# EAGLE board keyswitch (EAGLE 8.1.1)
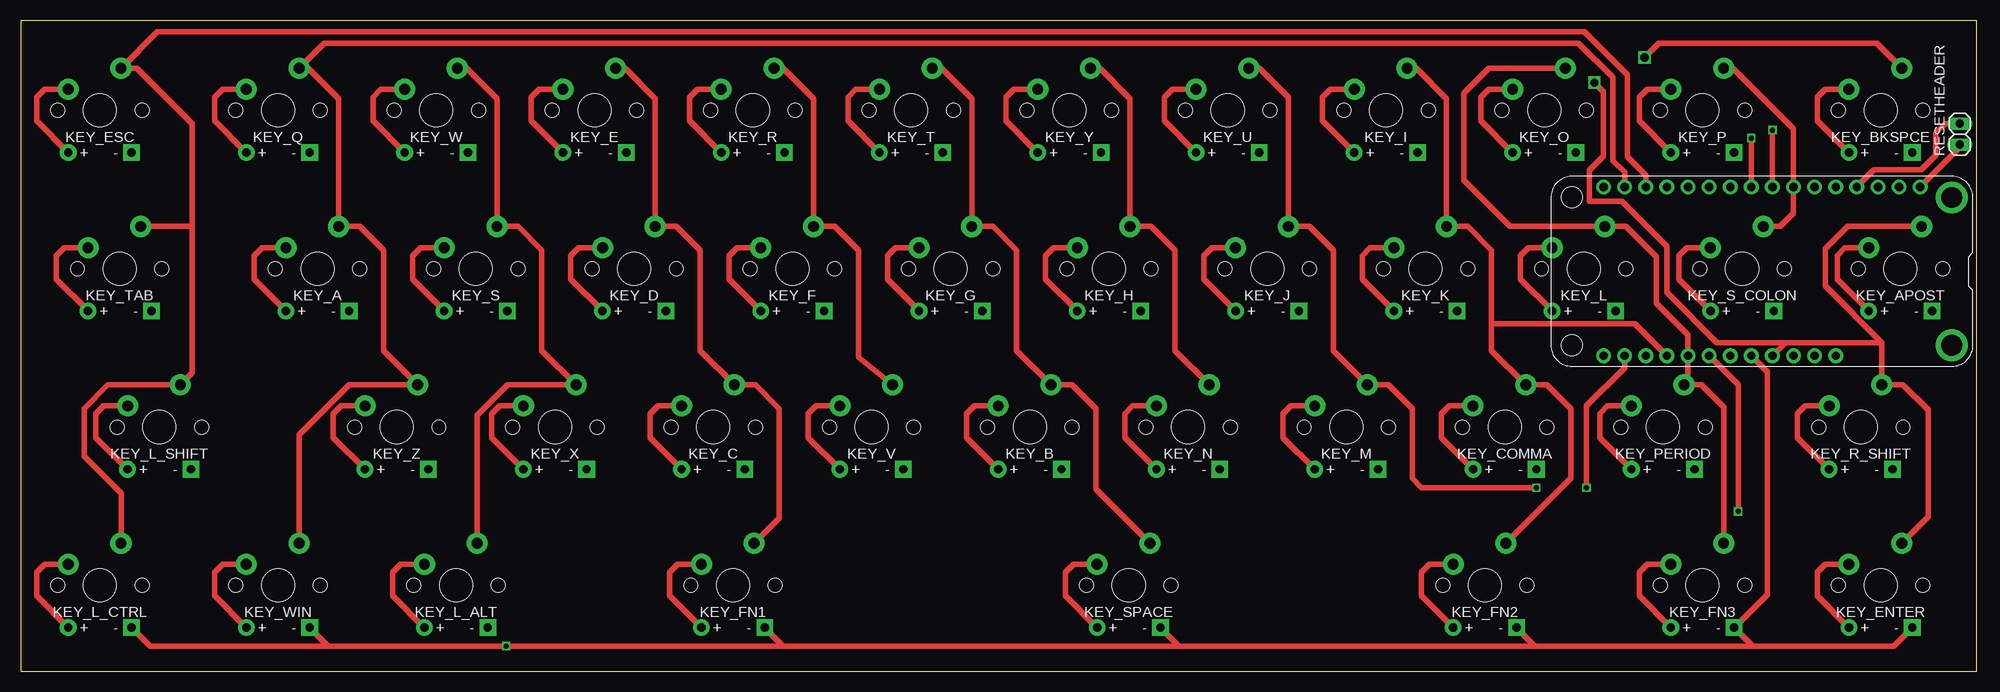
[diagram p0: board, top side]
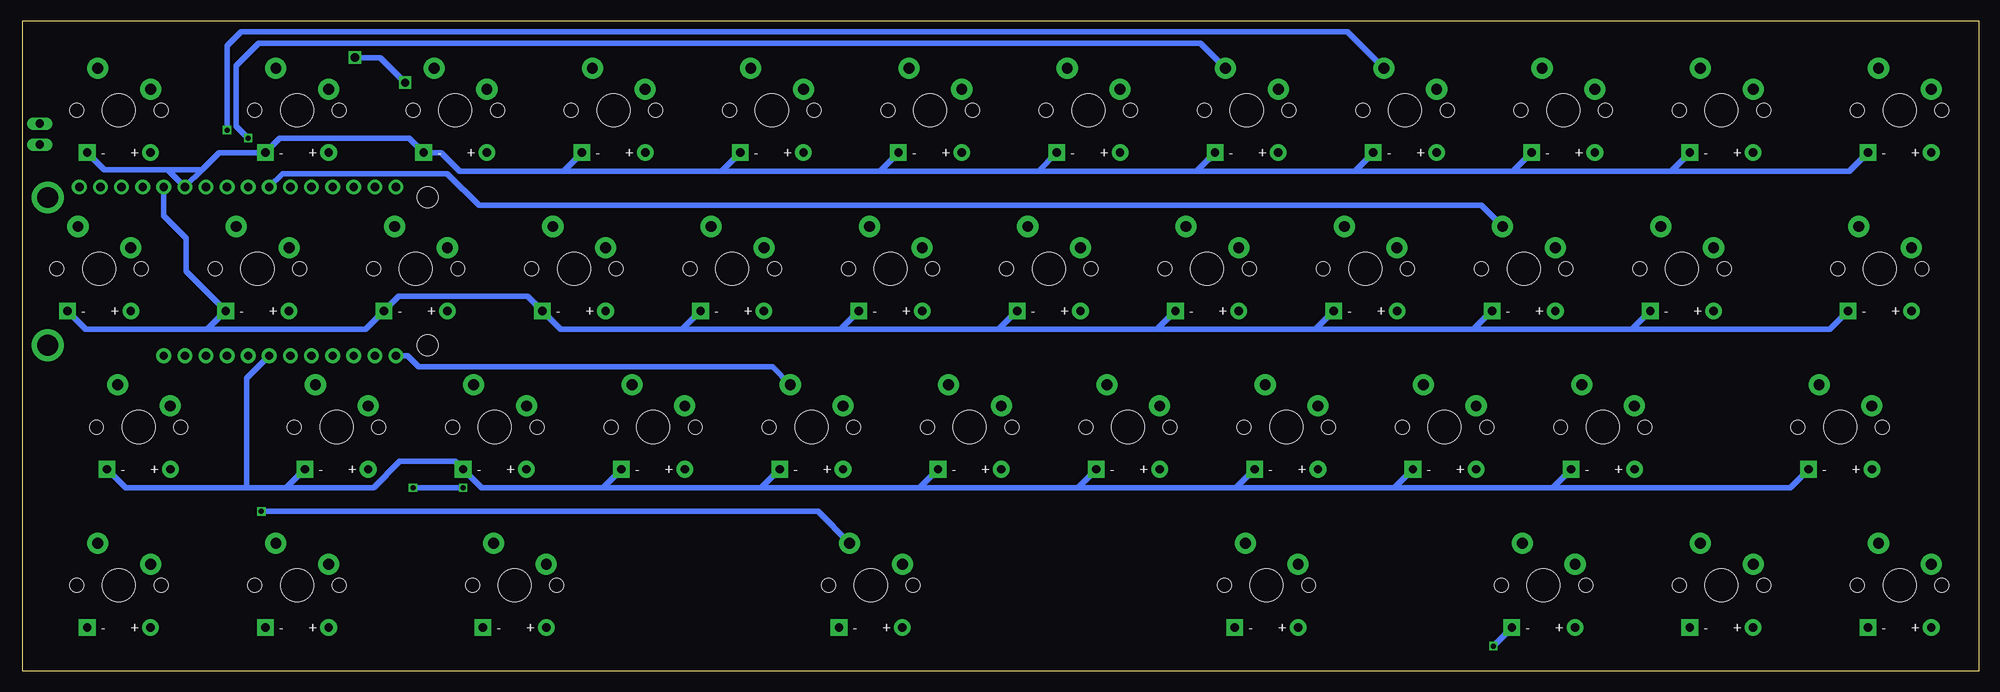
[diagram p1: board, bottom side, seen from below]

Size 235.41 x 78.25 mm. Coordinates in mm from the lower left corner, seen from the top.
Outline: 0,0 235.41,0 235.41,78.25 0,78.25 0,0
Copper layers (1*16): Top 0.035mm / dielectric 1.5mm / Bottom 0.035mm
Design rules "keyswitch": minimum track width 10mil, minimum drill 20mil, track to track 0.205mm, track to pad 0.205mm, pad to pad 0.205mm, via to via 0.205mm, smd to smd 8mil, copper to edge 20mil, drill to drill 8mil, minimum pad ring 10mil, minimum via ring 8mil, stop-mask expansion 4mil, vias tented up to drill 0mil, thermal gap 10mil
Net classes: 0 default: clearance 0.205 mm

## Footprints (pad centres in the part's own frame; a part is rotated, then mirrored left to right if it is on the bottom)
FEATHERWING_DIM = drill 1 pad 1.778: 1 6.35,1.27; 2 8.89,1.27; 3 11.43,1.27; 4 13.97,1.27; 5 16.51,1.27; 6 19.05,1.27; 7 21.59,1.27; 8 24.13,1.27; 9 26.67,1.27; 10 29.21,1.27; 11 31.75,1.27; 12 34.29,1.27; 13 36.83,1.27; 14 39.37,1.27; 15 41.91,1.27; 16 44.45,1.27; 17 44.45,21.59; 18 41.91,21.59; 19 39.37,21.59; 20 36.83,21.59; 21 34.29,21.59; 22 31.75,21.59; 23 29.21,21.59; 24 26.67,21.59; 25 24.13,21.59; 26 21.59,21.59; 27 19.05,21.59; 28 16.51,21.59 | drill 2.5 pad 3.81: P$1 2.54,20.32; P$2 2.54,2.54 | hole 2.54: 48.26,20.32; 48.26,2.54
MX-1U-DIODE = drill 1 pad 2: D+ -3.81,-5.08 | drill 1 pad 2 square: D- 3.81,-5.08 | drill 1.3 pad 2.54: MX1 -3.81,2.54; MX2 2.54,5.08 | hole 4: 0,0 | hole 1.7: -5.08,0; 5.08,0
1X02 = drill 1.016 long: 1 -1.27,0; 2 1.27,0

## Placement (x,y rotation side)
FEATHER  FEATHERWING_NODIM  [FEATHERWING_DIM]  234.95,59.53 180 top
KEY_A  KEYSWITCH-DIODE-MX-1U-DIODE  [MX-1U-DIODE]  35.72,48.42 0 top
KEY_APOST  KEYSWITCH-DIODE-MX-1U-DIODE  [MX-1U-DIODE]  226.22,48.42 0 top
KEY_B  KEYSWITCH-DIODE-MX-1U-DIODE  [MX-1U-DIODE]  121.44,29.37 0 top
KEY_BKSPCE  KEYSWITCH-DIODE-MX-1U-DIODE  [MX-1U-DIODE]  223.84,67.47 0 top
KEY_C  KEYSWITCH-DIODE-MX-1U-DIODE  [MX-1U-DIODE]  83.34,29.37 0 top
KEY_COMMA  KEYSWITCH-DIODE-MX-1U-DIODE  [MX-1U-DIODE]  178.59,29.37 0 top
KEY_D  KEYSWITCH-DIODE-MX-1U-DIODE  [MX-1U-DIODE]  73.82,48.42 0 top
KEY_E  KEYSWITCH-DIODE-MX-1U-DIODE  [MX-1U-DIODE]  69.06,67.47 0 top
KEY_ENTER  KEYSWITCH-DIODE-MX-1U-DIODE  [MX-1U-DIODE]  223.84,10.32 0 top
KEY_ESC  KEYSWITCH-DIODE-MX-1U-DIODE  [MX-1U-DIODE]  9.53,67.47 0 top
KEY_F  KEYSWITCH-DIODE-MX-1U-DIODE  [MX-1U-DIODE]  92.87,48.42 0 top
KEY_FN1  KEYSWITCH-DIODE-MX-1U-DIODE  [MX-1U-DIODE]  85.73,10.32 0 top
KEY_FN2  KEYSWITCH-DIODE-MX-1U-DIODE  [MX-1U-DIODE]  176.21,10.32 0 top
KEY_FN3  KEYSWITCH-DIODE-MX-1U-DIODE  [MX-1U-DIODE]  202.41,10.32 0 top
KEY_G  KEYSWITCH-DIODE-MX-1U-DIODE  [MX-1U-DIODE]  111.92,48.42 0 top
KEY_H  KEYSWITCH-DIODE-MX-1U-DIODE  [MX-1U-DIODE]  130.97,48.42 0 top
KEY_I  KEYSWITCH-DIODE-MX-1U-DIODE  [MX-1U-DIODE]  164.31,67.47 0 top
KEY_J  KEYSWITCH-DIODE-MX-1U-DIODE  [MX-1U-DIODE]  150.02,48.42 0 top
KEY_K  KEYSWITCH-DIODE-MX-1U-DIODE  [MX-1U-DIODE]  169.07,48.42 0 top
KEY_L  KEYSWITCH-DIODE-MX-1U-DIODE  [MX-1U-DIODE]  188.12,48.42 0 top
KEY_L_ALT  KEYSWITCH-DIODE-MX-1U-DIODE  [MX-1U-DIODE]  52.39,10.32 0 top
KEY_L_CTRL  KEYSWITCH-DIODE-MX-1U-DIODE  [MX-1U-DIODE]  9.53,10.32 0 top
KEY_L_SHIFT  KEYSWITCH-DIODE-MX-1U-DIODE  [MX-1U-DIODE]  16.67,29.37 0 top
KEY_M  KEYSWITCH-DIODE-MX-1U-DIODE  [MX-1U-DIODE]  159.54,29.37 0 top
KEY_N  KEYSWITCH-DIODE-MX-1U-DIODE  [MX-1U-DIODE]  140.49,29.37 0 top
KEY_O  KEYSWITCH-DIODE-MX-1U-DIODE  [MX-1U-DIODE]  183.36,67.47 0 top
KEY_P  KEYSWITCH-DIODE-MX-1U-DIODE  [MX-1U-DIODE]  202.41,67.47 0 top
KEY_PERIOD  KEYSWITCH-DIODE-MX-1U-DIODE  [MX-1U-DIODE]  197.64,29.37 0 top
KEY_Q  KEYSWITCH-DIODE-MX-1U-DIODE  [MX-1U-DIODE]  30.96,67.47 0 top
KEY_R  KEYSWITCH-DIODE-MX-1U-DIODE  [MX-1U-DIODE]  88.11,67.47 0 top
KEY_R_SHIFT  KEYSWITCH-DIODE-MX-1U-DIODE  [MX-1U-DIODE]  221.46,29.37 0 top
KEY_S  KEYSWITCH-DIODE-MX-1U-DIODE  [MX-1U-DIODE]  54.77,48.42 0 top
KEY_S_COLON  KEYSWITCH-DIODE-MX-1U-DIODE  [MX-1U-DIODE]  207.17,48.42 0 top
KEY_SPACE  KEYSWITCH-DIODE-MX-1U-DIODE  [MX-1U-DIODE]  133.35,10.32 0 top
KEY_T  KEYSWITCH-DIODE-MX-1U-DIODE  [MX-1U-DIODE]  107.16,67.47 0 top
KEY_TAB  KEYSWITCH-DIODE-MX-1U-DIODE  [MX-1U-DIODE]  11.91,48.42 0 top
KEY_U  KEYSWITCH-DIODE-MX-1U-DIODE  [MX-1U-DIODE]  145.26,67.47 0 top
KEY_V  KEYSWITCH-DIODE-MX-1U-DIODE  [MX-1U-DIODE]  102.39,29.37 0 top
KEY_W  KEYSWITCH-DIODE-MX-1U-DIODE  [MX-1U-DIODE]  50.01,67.47 0 top
KEY_WIN  KEYSWITCH-DIODE-MX-1U-DIODE  [MX-1U-DIODE]  30.96,10.32 0 top
KEY_X  KEYSWITCH-DIODE-MX-1U-DIODE  [MX-1U-DIODE]  64.29,29.37 0 top
KEY_Y  KEYSWITCH-DIODE-MX-1U-DIODE  [MX-1U-DIODE]  126.21,67.47 0 top
KEY_Z  KEYSWITCH-DIODE-MX-1U-DIODE  [MX-1U-DIODE]  45.24,29.37 0 top
RESETHEADER  [1X02]  233.36,64.61 90 top

## Library data of the parts
FEATHER = adafruit
KEY_A KEY_APOST KEY_B KEY_BKSPCE KEY_C KEY_COMMA KEY_D KEY_E KEY_ENTER KEY_ESC KEY_F KEY_FN1-KEY_FN3 KEY_G KEY_H KEY_I KEY_J KEY_K KEY_L KEY_L_ALT KEY_L_CTRL KEY_L_SHIFT KEY_M KEY_N KEY_O KEY_P KEY_PERIOD KEY_Q KEY_R KEY_R_SHIFT KEY_S KEY_S_COLON KEY_SPACE KEY_T KEY_TAB KEY_U KEY_V KEY_W KEY_WIN KEY_X KEY_Y KEY_Z = Keyboard
RESETHEADER = pinhead

## Nets
GND: FEATHER.4 RESETHEADER.2
N$1: KEY_ESC.D+ KEY_ESC.MX1
N$2: KEY_Q.D+ KEY_Q.MX1
N$3: KEY_W.D+ KEY_W.MX1
N$4: KEY_E.D+ KEY_E.MX1
N$5: KEY_R.D+ KEY_R.MX1
N$6: KEY_T.D+ KEY_T.MX1
N$7: KEY_Y.D+ KEY_Y.MX1
N$8: KEY_U.D+ KEY_U.MX1
N$9: KEY_I.D+ KEY_I.MX1
N$10: KEY_O.D+ KEY_O.MX1
N$11: KEY_P.D+ KEY_P.MX1
N$12: KEY_BKSPCE.D+ KEY_BKSPCE.MX1
N$13: KEY_TAB.D+ KEY_TAB.MX1
N$14: KEY_A.D+ KEY_A.MX1
N$15: KEY_S.D+ KEY_S.MX1
N$16: KEY_D.D+ KEY_D.MX1
N$17: KEY_F.D+ KEY_F.MX1
N$18: KEY_G.D+ KEY_G.MX1
N$19: KEY_H.D+ KEY_H.MX1
N$20: KEY_J.D+ KEY_J.MX1
N$21: KEY_K.D+ KEY_K.MX1
N$22: KEY_L.D+ KEY_L.MX1
N$23: KEY_S_COLON.D+ KEY_S_COLON.MX1
N$24: KEY_APOST.D+ KEY_APOST.MX1
N$25: KEY_L_SHIFT.D+ KEY_L_SHIFT.MX1
N$26: KEY_Z.D+ KEY_Z.MX1
N$27: KEY_X.D+ KEY_X.MX1
N$28: KEY_C.D+ KEY_C.MX1
N$29: KEY_V.D+ KEY_V.MX1
N$30: KEY_B.D+ KEY_B.MX1
N$31: KEY_N.D+ KEY_N.MX1
N$32: KEY_M.D+ KEY_M.MX1
N$33: KEY_COMMA.D+ KEY_COMMA.MX1
N$34: KEY_PERIOD.D+ KEY_PERIOD.MX1
N$35: FEATHER.8 KEY_C.MX2 KEY_D.MX2 KEY_E.MX2 KEY_FN1.MX2
N$36: KEY_R_SHIFT.D+ KEY_R_SHIFT.MX1
N$37: KEY_WIN.D+ KEY_WIN.MX1
N$38: KEY_L_ALT.D+ KEY_L_ALT.MX1
N$39: KEY_FN1.D+ KEY_FN1.MX1
N$40: FEATHER.1 RESETHEADER.1
N$41: KEY_SPACE.D+ KEY_SPACE.MX1
N$42: FEATHER.15 KEY_A.MX2 KEY_Q.MX2 KEY_WIN.MX2 KEY_Z.MX2
N$43: FEATHER.10 KEY_L_ALT.MX2 KEY_S.MX2 KEY_W.MX2 KEY_X.MX2
N$44: KEY_FN2.D+ KEY_FN2.MX1
N$45: KEY_FN3.D+ KEY_FN3.MX1
N$46: FEATHER.22 KEY_B.MX2 KEY_G.MX2 KEY_SPACE.MX2 KEY_T.MX2
N$47: KEY_ENTER.D+ KEY_ENTER.MX1
N$49: FEATHER.9 KEY_F.MX2 KEY_R.MX2 KEY_V.MX2
N$50: FEATHER.24 KEY_ENTER.D- KEY_FN1.D- KEY_FN2.D- KEY_FN3.D- KEY_L_ALT.D- KEY_L_CTRL.D- KEY_SPACE.D- KEY_WIN.D-
N$51: FEATHER.17 KEY_H.MX2 KEY_N.MX2 KEY_Y.MX2
N$52: FEATHER.21 KEY_FN3.MX2 KEY_L.MX2 KEY_O.MX2 KEY_PERIOD.MX2
N$53: FEATHER.20 KEY_COMMA.MX2 KEY_FN2.MX2 KEY_I.MX2 KEY_K.MX2
N$54: FEATHER.18 KEY_J.MX2 KEY_M.MX2 KEY_U.MX2
N$55: FEATHER.7 KEY_P.MX2 KEY_S_COLON.MX2
N$56: FEATHER.25 KEY_APOST.MX2 KEY_BKSPCE.MX2 KEY_ENTER.MX2 KEY_R_SHIFT.MX2
N$57: FEATHER.6 KEY_BKSPCE.D- KEY_E.D- KEY_ESC.D- KEY_I.D- KEY_O.D- KEY_P.D- KEY_Q.D- KEY_R.D- KEY_T.D- KEY_U.D- KEY_W.D- KEY_Y.D-
N$58: FEATHER.14 KEY_ESC.MX2 KEY_L_CTRL.MX2 KEY_L_SHIFT.MX2 KEY_TAB.MX2
N$59: FEATHER.23 KEY_B.D- KEY_C.D- KEY_COMMA.D- KEY_L_SHIFT.D- KEY_M.D- KEY_N.D- KEY_PERIOD.D- KEY_R_SHIFT.D- KEY_V.D- KEY_X.D- KEY_Z.D-
N$60: KEY_L_CTRL.D+ KEY_L_CTRL.MX1
N$72: FEATHER.5 KEY_A.D- KEY_APOST.D- KEY_D.D- KEY_F.D- KEY_G.D- KEY_H.D- KEY_J.D- KEY_K.D- KEY_L.D- KEY_S.D- KEY_S_COLON.D- KEY_TAB.D-

## Tracks (layer width: path | path; a pad name or v marks a point on that pad's centre or on a via)
GND
  Top 0.635: FEATHER.4 223.04,60.32 228.76,60.32 230.5,62.07 230.5,64.77 231.62,65.88 RESETHEADER.2
N$1
  Top 0.635: KEY_ESC.MX1 2.86,70.01 1.91,69.06 1.91,66.2 KEY_ESC.D+
N$2
  Top 0.635: KEY_Q.MX1 24.29,70.01 23.34,69.06 23.34,66.2 KEY_Q.D+
N$3
  Top 0.635: KEY_W.MX1 43.34,70.01 42.39,69.06 42.39,66.2 KEY_W.D+
N$4
  Top 0.635: KEY_E.MX1 62.39,70.01 61.44,69.06 61.44,66.2 KEY_E.D+
N$5
  Top 0.635: KEY_R.MX1 81.44,70.01 80.49,69.06 80.49,66.2 KEY_R.D+
N$6
  Top 0.635: KEY_T.MX1 100.49,70.01 99.54,69.06 99.54,66.2 KEY_T.D+
N$7
  Top 0.635: KEY_Y.MX1 119.54,70.01 118.59,69.06 118.59,66.2 KEY_Y.D+
N$8
  Top 0.635: KEY_U.MX1 138.59,70.01 137.64,69.06 137.64,66.2 KEY_U.D+
N$9
  Top 0.635: KEY_I.MX1 157.64,70.01 156.69,69.06 156.69,66.2 KEY_I.D+
N$10
  Top 0.635: KEY_O.MX1 176.69,70.01 175.74,69.06 175.74,66.2 KEY_O.D+
N$11
  Top 0.635: KEY_P.MX1 195.74,70.01 194.79,69.06 194.79,66.2 KEY_P.D+
N$12
  Top 0.635: KEY_BKSPCE.MX1 217.17,70.01 216.22,69.06 216.22,66.2 KEY_BKSPCE.D+
N$13
  Top 0.635: KEY_TAB.MX1 5.24,50.96 4.29,50.01 4.29,47.15 KEY_TAB.D+
N$14
  Top 0.635: KEY_A.MX1 29.05,50.96 28.1,50.01 28.1,47.15 KEY_A.D+
N$15
  Top 0.635: KEY_S.MX1 48.1,50.96 47.15,50.01 47.15,47.15 KEY_S.D+
N$16
  Top 0.635: KEY_D.MX1 67.15,50.96 66.2,50.01 66.2,47.15 KEY_D.D+
N$17
  Top 0.635: KEY_F.MX1 86.2,50.96 85.25,50.01 85.25,47.15 KEY_F.D+
N$18
  Top 0.635: KEY_G.MX1 105.25,50.96 104.3,50.01 104.3,47.15 KEY_G.D+
N$19
  Top 0.635: KEY_H.MX1 124.3,50.96 123.35,50.01 123.35,47.15 KEY_H.D+
N$20
  Top 0.635: KEY_J.MX1 143.35,50.96 142.4,50.01 142.4,47.15 KEY_J.D+
N$21
  Top 0.635: KEY_K.MX1 162.4,50.96 161.45,50.01 161.45,47.15 KEY_K.D+
N$22
  Top 0.635: KEY_L.MX1 181.45,50.96 180.5,50.01 180.5,47.15 KEY_L.D+
N$23
  Top 0.635: KEY_S_COLON.MX1 200.5,50.96 199.55,50.01 199.55,47.15 KEY_S_COLON.D+
N$24
  Top 0.635: KEY_APOST.MX1 219.55,50.96 218.6,50.01 218.6,47.15 KEY_APOST.D+
N$25
  Top 0.635: KEY_L_SHIFT.MX1 10,31.91 9.05,30.96 9.05,28.1 KEY_L_SHIFT.D+
N$26
  Top 0.635: KEY_Z.MX1 38.58,31.91 37.62,30.96 37.62,28.1 KEY_Z.D+
N$27
  Top 0.635: KEY_X.MX1 57.63,31.91 56.67,30.96 56.67,28.1 KEY_X.D+
N$28
  Top 0.635: KEY_C.MX1 76.68,31.91 75.72,30.96 75.72,28.1 KEY_C.D+
N$29
  Top 0.635: KEY_V.MX1 95.73,31.91 94.77,30.96 94.77,28.1 KEY_V.D+
N$30
  Top 0.635: KEY_B.MX1 114.78,31.91 113.82,30.96 113.82,28.1 KEY_B.D+
N$31
  Top 0.635: KEY_N.MX1 133.83,31.91 132.87,30.96 132.87,28.1 KEY_N.D+
N$32
  Top 0.635: KEY_M.MX1 152.88,31.91 151.92,30.96 151.92,28.1 KEY_M.D+
N$33
  Top 0.635: KEY_COMMA.MX1 171.93,31.91 170.97,30.96 170.97,28.1 KEY_COMMA.D+
N$34
  Top 0.635: KEY_PERIOD.MX1 190.98,31.91 190.02,30.96 190.02,28.1 KEY_PERIOD.D+
N$35  (via drill 0.6)
  Top 0.635: KEY_E.MX2 72.71,72.55 76.36,68.9 KEY_D.MX2 78.9,53.5 81.76,50.64 81.76,38.58 KEY_C.MX2 88.42,34.45 91.28,31.59 91.28,18.41 KEY_FN1.MX2 | v210.82,65.09 FEATHER.8
  Bottom 0.635: KEY_E.MX2 75.97,76.92 85.41,76.92 209.15,76.92 210.82,75.25 v210.82,65.09
N$36
  Top 0.635: KEY_R_SHIFT.MX1 214.79,31.91 213.84,30.96 213.84,28.1 KEY_R_SHIFT.D+
N$37
  Top 0.635: KEY_WIN.MX1 24.29,12.86 23.34,11.91 23.34,9.05 KEY_WIN.D+
N$38
  Top 0.635: KEY_L_ALT.MX1 45.72,12.86 44.77,11.91 44.77,9.05 KEY_L_ALT.D+
N$39
  Top 0.635: KEY_FN1.MX1 79.06,12.86 78.11,11.91 78.11,9.05 KEY_FN1.D+
N$40
  Top 0.635: FEATHER.1 233.36,63.02 RESETHEADER.1
N$41
  Top 0.635: KEY_SPACE.MX1 126.68,12.86 125.73,11.91 125.73,9.05 KEY_SPACE.D+
N$42
  Top 0.635: KEY_WIN.MX2 33.5,28.42 39.53,34.45 KEY_Z.MX2 43.66,38.58 43.66,50.64 40.8,53.5 KEY_A.MX2 38.26,68.9 34.61,72.55 KEY_Q.MX2 36.51,75.56 187.48,75.56 191.61,71.44 191.61,61.44 193.04,60.01 FEATHER.15
N$43
  Top 0.635: KEY_W.MX2 53.66,72.55 57.31,68.9 KEY_S.MX2 59.85,53.5 62.71,50.64 62.71,38.58 KEY_X.MX2 58.58,34.45 54.93,30.8 KEY_L_ALT.MX2
  Bottom 0.635: FEATHER.10 204.15,59.85 184.31,59.85 180.5,56.04 59.85,56.04 KEY_S.MX2
N$44
  Top 0.635: KEY_FN2.MX1 169.55,12.86 168.59,11.91 168.59,9.05 KEY_FN2.D+
N$45
  Top 0.635: KEY_FN3.MX1 195.74,12.86 194.79,11.91 194.79,9.05 KEY_FN3.D+
N$46  (via drill 0.6)
  Top 0.635: KEY_T.MX2 110.81,72.55 114.46,68.9 KEY_G.MX2 117,53.5 119.86,50.64 119.86,38.58 KEY_B.MX2 126.52,34.45 129.38,31.59 129.38,21.91 KEY_SPACE.MX2 | FEATHER.22 206.69,34.45 v206.69,19.21
  Bottom 0.635: 142.24,19.21 141.29,19.21 | 142.24,19.21 v206.69,19.21 | KEY_SPACE.MX2 139.7,19.21 142.24,19.21
N$47
  Top 0.635: KEY_ENTER.MX1 217.17,12.86 216.22,11.91 216.22,9.05 KEY_ENTER.D+
N$49  (via drill 0.6)
  Top 0.635: KEY_R.MX2 91.76,72.55 95.41,68.9 KEY_F.MX2 97.95,53.5 100.81,50.64 100.81,37.78 KEY_V.MX2 | v208.28,64.13 FEATHER.9
  Bottom 0.635: KEY_R.MX2 93.66,75.56 207.01,75.56 209.71,72.87 209.71,65.56 v208.28,64.13
N$50  (via drill 0.6)
  Top 0.635: KEY_L_CTRL.D- 15.56,3.02 36.99,3.02 | 36.99,3.02 KEY_WIN.D- | 36.99,3.02 v58.42,3.02 91.76,3.02 | KEY_FN1.D- 91.76,3.02 | 91.76,3.02 139.38,3.02 | KEY_SPACE.D- 139.38,3.02 | 139.38,3.02 182.25,3.02 | 182.25,3.02 KEY_FN2.D- | 182.25,3.02 208.44,3.02 | 208.44,3.02 KEY_FN3.D- 210.19,9.21 210.19,36.04 FEATHER.24 | KEY_ENTER.D- 225.43,3.02 208.44,3.02
  Bottom 0.635: v58.42,3.02 KEY_L_ALT.D-
N$51
  Top 0.635: KEY_Y.MX2 129.86,72.55 133.51,68.9 KEY_H.MX2 136.05,53.5 138.91,50.64 138.91,38.58 KEY_N.MX2
  Bottom 0.635: FEATHER.17 189.1,37.94 187.77,36.61 145.19,36.61 KEY_N.MX2
N$52
  Top 0.635: KEY_FN3.MX2 204.95,31.75 202.25,34.45 KEY_PERIOD.MX2 200.66,34.92 FEATHER.21 200.66,40.48 196.85,44.29 196.85,49.85 193.2,53.5 KEY_L.MX2 179.23,53.5 173.67,59.05 173.67,69.53 176.69,72.55 KEY_O.MX2
N$53
  Top 0.635: KEY_I.MX2 167.96,72.55 171.61,68.9 KEY_K.MX2 174.15,53.5 177.01,50.64 177.01,41.91 | 177.01,41.91 177.01,38.58 KEY_COMMA.MX2 183.67,34.45 186.53,31.59 186.53,23.18 KEY_FN2.MX2 | 177.01,41.91 177.1,41.81 194.25,41.81 FEATHER.20
N$54  (via drill 0.6)
  Top 0.635: KEY_U.MX2 149.07,72.55 152.56,69.06 KEY_J.MX2 155.1,53.5 157.96,50.64 157.96,38.58 KEY_M.MX2 164.62,34.45 167.48,31.59 167.48,23.18 168.59,22.07 v182.4,22.07 | v188.44,22.07 188.44,31.91 193.04,36.51 FEATHER.18
  Bottom 0.635: v182.4,22.07 v188.44,22.07
N$55
  Top 0.635: KEY_P.MX2 206.06,72.55 213.36,65.25 FEATHER.7 213.36,55.09 211.77,53.5 KEY_S_COLON.MX2
N$56  (via drill 1)
  Top 0.635: KEY_ENTER.MX2 229.55,18.57 229.55,31.43 226.54,34.45 KEY_R_SHIFT.MX2 224,39.53 | KEY_APOST.MX2 219.87,53.5 217.17,50.8 217.17,46.35 224,39.53 | FEATHER.25 212.41,39.53 | 212.41,39.53 224,39.53 | KEY_BKSPCE.MX2 223.36,75.56 197.17,75.56 v195.42,73.82 | 212.41,39.53 204.15,39.53 198.12,45.56 198.12,51.12 192.72,56.51 188.79,56.51 188.79,60.29 190.45,61.96 190.45,69.74 v189.39,70.8
  Bottom 0.635: v195.42,73.82 192.41,73.82 v189.39,70.8
N$57
  Bottom 0.635: KEY_ESC.D- 15.56,60.17 36.99,60.17 | 36.99,60.17 KEY_Q.D- | 36.99,60.17 56.04,60.17 | KEY_W.D- 56.04,60.17 | 56.04,60.17 75.09,60.17 | 75.09,60.17 KEY_E.D- | 75.09,60.17 94.14,60.17 | 94.14,60.17 KEY_R.D- | 94.14,60.17 113.19,60.17 | 113.19,60.17 KEY_T.D- | 113.19,60.17 132.24,60.17 | 132.24,60.17 KEY_Y.D- | 132.24,60.17 151.29,60.17 | KEY_U.D- 151.29,60.17 | 151.29,60.17 170.34,60.17 | KEY_I.D- 170.34,60.17 | 170.34,60.17 182.8,60.17 185.03,62.39 KEY_O.D- 188.91,64.14 204.47,64.14 KEY_P.D- 211.77,62.39 213.84,60.32 | 213.84,60.32 FEATHER.6 217.96,60.32 | KEY_BKSPCE.D- 225.58,60.32 217.96,60.32 | 217.96,60.32 213.84,60.32
N$58
  Top 0.635: 12.07,20.16 12.07,20.64 | 12.07,20.16 KEY_L_CTRL.MX2 | 20.64,53.5 20.64,35.88 KEY_L_SHIFT.MX2 11.91,34.45 10.48,34.45 7.62,31.59 7.62,25.88 12.07,21.43 12.07,20.16 | 20.64,53.5 20.64,65.88 13.97,72.55 KEY_ESC.MX2 16.43,76.92 188.19,76.92 193.36,71.75 193.36,61.91 195.58,59.69 FEATHER.14 | KEY_TAB.MX2 20.64,53.5
N$59
  Bottom 0.635: KEY_L_SHIFT.D- 22.7,22.07 51.28,22.07 | 51.28,22.07 KEY_Z.D- | 51.28,22.07 70.33,22.07 | KEY_X.D- 70.33,22.07 | 70.33,22.07 89.38,22.07 | KEY_C.D- 89.38,22.07 | 89.38,22.07 108.43,22.07 | 108.43,22.07 KEY_V.D- | 108.43,22.07 127.48,22.07 | KEY_B.D- 127.48,22.07 | 127.48,22.07 146.53,22.07 | 146.53,22.07 KEY_N.D- | 146.53,22.07 165.58,22.07 | KEY_M.D- 165.58,22.07 | 165.58,22.07 180.18,22.07 KEY_COMMA.D- 183.36,25.24 190.02,25.24 193.2,22.07 203.68,22.07 | 203.68,22.07 KEY_PERIOD.D- | KEY_R_SHIFT.D- 223.04,22.07 208.44,22.07 | 203.68,22.07 208.44,22.07 | FEATHER.23 208.44,35.24 208.44,22.07
N$60
  Top 0.635: KEY_L_CTRL.MX1 2.86,12.86 1.91,11.91 1.91,9.05 KEY_L_CTRL.D+
N$72
  Bottom 0.635: KEY_TAB.D- 17.94,41.12 41.75,41.12 | KEY_A.D- 41.75,41.12 | 41.75,41.12 60.8,41.12 | 60.8,41.12 KEY_S.D- | 60.8,41.12 79.85,41.12 | KEY_D.D- 79.85,41.12 | 79.85,41.12 98.9,41.12 | KEY_F.D- 98.9,41.12 | 98.9,41.12 117.95,41.12 | KEY_G.D- 117.95,41.12 | 117.95,41.12 137,41.12 | 137,41.12 KEY_H.D- | 137,41.12 156.05,41.12 | KEY_J.D- 156.05,41.12 | 156.05,41.12 170.66,41.12 KEY_K.D- 174.62,45.08 190.18,45.08 KEY_L.D- 194.15,41.12 213.2,41.12 | 213.2,41.12 KEY_S_COLON.D- 215.74,48.1 215.74,52.07 218.44,54.77 FEATHER.5 | KEY_APOST.D- 227.81,41.12 213.2,41.12